# EAGLE board ArabaSilecek (EAGLE 9.7.0)

Size 175.48 x 87.64 mm. Coordinates in mm from the lower left corner, seen from the top.
Outline: 0,0 175.48,0 175.48,87.64 0,87.64 0,0
Copper layers (1*16): Top 0.035mm / dielectric 1.5mm / Bottom 0.035mm
Design rules "default": minimum track width 6mil, minimum drill 0.35mm, track to track 6mil, track to pad 6mil, pad to pad 6mil, via to via 6mil, smd to smd 6mil, copper to edge 40mil, drill to drill 6mil, minimum pad ring 10mil, minimum via ring 8mil, stop-mask expansion 4mil, vias tented up to drill 0mil, thermal gap 10mil

## Footprints (pad centres in the part's own frame; a part is rotated, then mirrored left to right if it is on the bottom)
MOTOR = drill 1.118 pad 3.15 octagon: + 2.54,0; - -2.54,0
HA-06-SM065 = drill 1 pad 1.676: 1 -2.54,-2.54; 2 0,2.54; 3 2.54,-2.54
SWITCH-SPDT-PTH-8.5X3.7MM = drill 1.016 pad 1.88: 1 -2.54,0; 2 0,0; 3 2.54,0
ARDUINO-UNO-R3-SHIELD = drill 1.016 pad 1.88: 3.3V 24.13,-2.54; 5V 24.13,0; A0 24.13,12.7; A1 24.13,15.24; A2 24.13,17.78; A3 24.13,20.32; A4 24.13,22.86; A5 24.13,25.4; AREF -24.13,-13.97; D2 -24.13,20.32; D3 -24.13,17.78; D4 -24.13,15.24; D5 -24.13,12.7; D6 -24.13,10.16; D7 -24.13,7.62; D8 -24.13,3.81; D9 -24.13,1.27; D10 -24.13,-1.27; D11 -24.13,-3.81; D12 -24.13,-6.35; D13 -24.13,-8.89; GND@0 24.13,2.54; GND@1 24.13,5.08; GND@2 -24.13,-11.43; IOREF 24.13,-7.62; NC 24.13,-10.16; RES 24.13,-5.08; RX -24.13,25.4; SCL -24.13,-19.05; SDA -24.13,-16.51; TX -24.13,22.86; VIN 24.13,7.62

## Placement (x,y rotation side)
MWIPER_1  MOTOR_HDR  [MOTOR]  68.17,79.39 0 top
MWIPER_2  MOTOR_HDR  [MOTOR]  167.22,77.53 0 top
RPOTRAIN_SENSOR  250k  [HA-06-SM065]  121.26,57.23 0 top
SIGNITION_SWITCH  TOGGLE  [SWITCH-SPDT-PTH-8.5X3.7MM]  103.48,57.74 0 top
SWIPER_SWITCH  TOGGLE  [SWITCH-SPDT-PTH-8.5X3.7MM]  152.05,57.13 0 top
UBCM  ARDUINO-UNO-R3-SHIELD  [ARDUINO-UNO-R3-SHIELD]  47.88,29.84 270 top

## Library data of the parts
MWIPER_1 MWIPER_2 RPOTRAIN_SENSOR SIGNITION_SWITCH SWIPER_SWITCH UBCM = Tinkercad

## Nets
UBCM_5V: RPOTRAIN_SENSOR.3 SIGNITION_SWITCH.3 SWIPER_SWITCH.1 UBCM.5V
UBCM_A4: RPOTRAIN_SENSOR.2 UBCM.A4
UBCM_D2: SIGNITION_SWITCH.2 UBCM.D2
UBCM_D3: SWIPER_SWITCH.2 UBCM.D3
UBCM_GND: MWIPER_1.- MWIPER_2.- RPOTRAIN_SENSOR.1 SIGNITION_SWITCH.1 SWIPER_SWITCH.3 UBCM.GND@0 UBCM.GND@1 UBCM.GND@2
UBCM_TX: MWIPER_1.+ MWIPER_2.+ UBCM.TX

## Tracks (layer width: path | path; a pad name or v marks a point on that pad's centre or on a via)
UBCM_5V  (3 unrouted)
UBCM_A4  (1 unrouted)
UBCM_D2  (1 unrouted)
UBCM_D3  (1 unrouted)
UBCM_GND  (7 unrouted)
UBCM_TX  (2 unrouted)